# Altium PCB PCB_3U_VHDCI_Baseboard.PCBDOC (part 2 of 2)
Units mil, origin at the board's own origin, x right, y up, seen from the top; angles counter-clockwise.
Board outline 6299 x 3937 mil, 4 copper layers (TopLayer, Internal Plane 1, Internal Plane 2, BottomLayer), stack 58.425 mil thick; 56 components, 165 nets, 629 pads, 192 vias.
Unrouted connection lines stored in the file: 2.
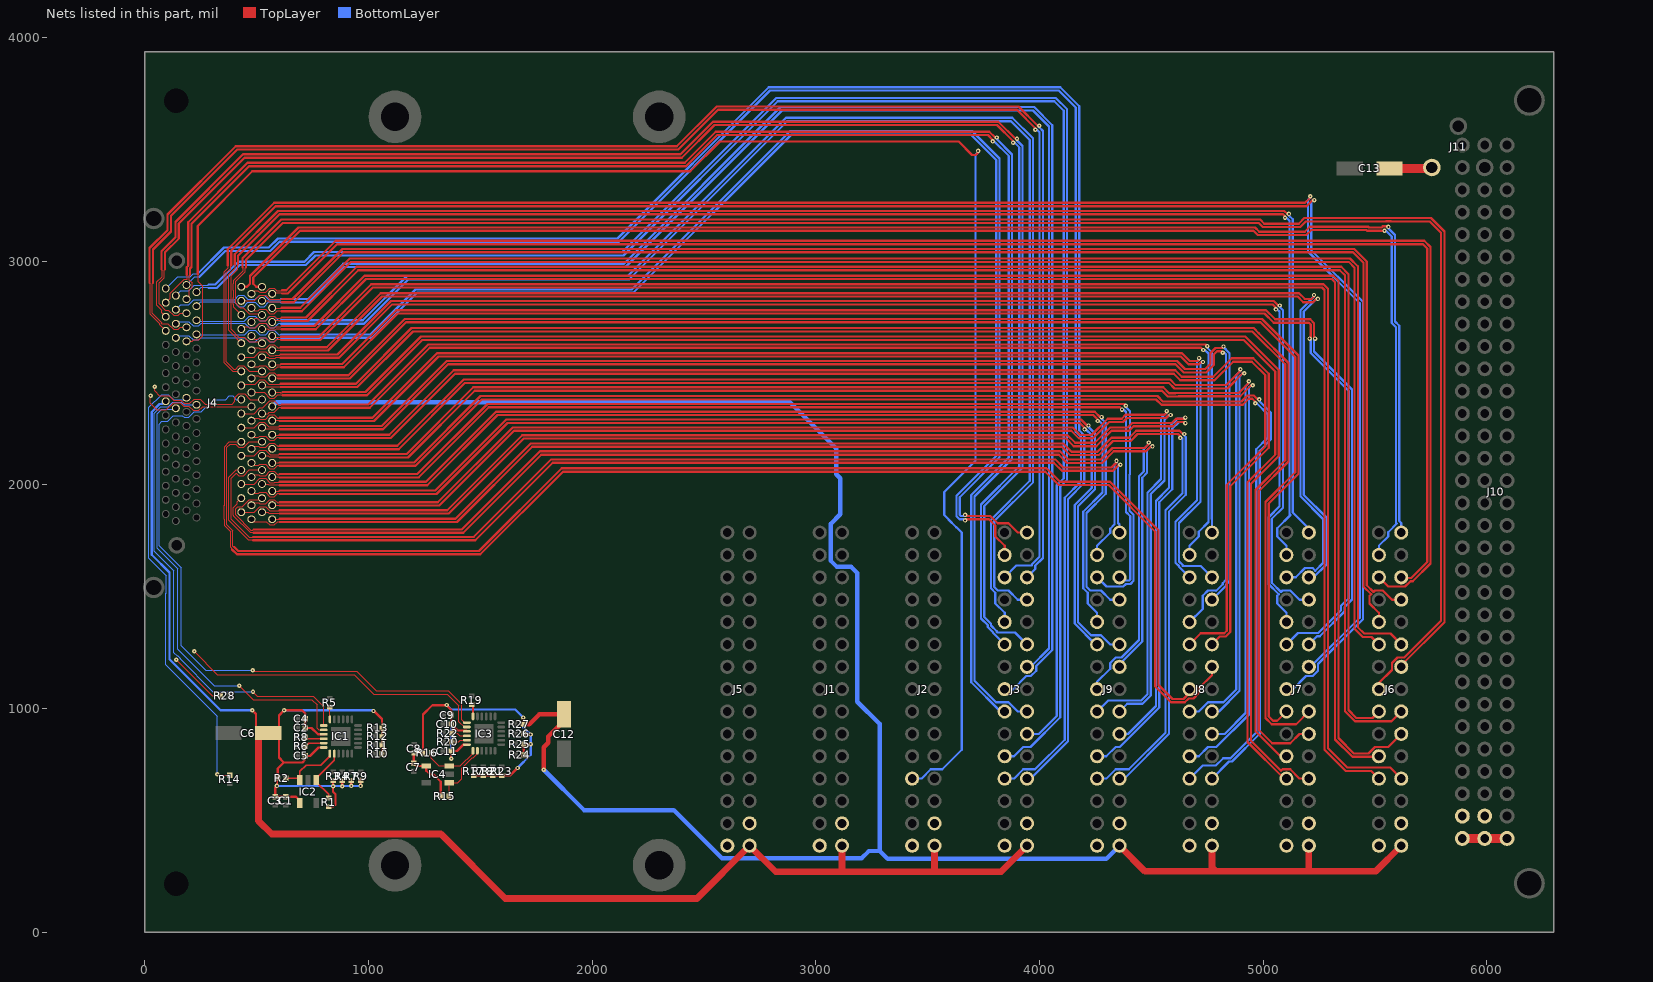
[diagram p4: the nets of this part, all layers, seen from the top]

## Via types
v1: diameter 19.68, hole 7.87, TopLayer to BottomLayer, 192 vias

## Nets (pads, with @x,y where several pads share a name; then routed paths per layer and width w, separated by ;. In a path a pad name is that pad's centre, name@x,y a point inside that pad or via, vN(x,y) a via of type N, cw(c..) or ccw(c..) an arc to the next point about the centre after c; other vN are vias at no path point) (continued)
LVDS3_8_P: J2.23 J4.L26 | length 7316.9
  TopLayer w5: J4.L26@185.43,2641.54 212.4,2641.54 218.68,2647.82 241.15,2647.82 259,2665.66 259,2888 238,2909 238,2940 235.5,2942.5 ; 535.32,3402 538.86,3402
  TopLayer w10: 235.5,2942.5 235.5,3157.71 479.79,3402 535.32,3402 ; 538.86,3402 2438,3402 2571,3535 3638,3535 3697.89,3475.11 3713.89,3475.11 3724.97,3486.18 v1(3724.97,3493.03)
  BottomLayer w10: J2.23@3430.32,686.62 3471.63,686.62 3513.13,728.11 3564.9,728.11 3652,815.21 3652,1787 3628,1811 3627.29,1811 3593,1845.29 3593,1846 3573.61,1865.39 3573.61,1967.82 3713.5,2107.71 3713.5,3474.71 3726.39,3487.61 3726.39,3491.61 v1(3724.97,3493.03)
LVDS4_1_N: J3.3 J4.L61 | length 6151.7
  TopLayer w10: v1(3667,1841.16) 3671.84,1846 3773.71,1846 3802.21,1817.5 3802.21,1769.43 3843.7,1727.93 J3.3@3843.7,1686.62
  BottomLayer w5: J4.L61@138.19,2657.28 147.66,2666.75 195.88,2666.75 214.82,2647.82 241.15,2647.82 252.22,2658.88 446.6,2658.88 465.54,2639.94 493.85,2639.94 512.78,2658.88 539.12,2658.88 558.06,2639.94 578.95,2639.94 599.17,2660.16 607,2660.16 609.5,2657.66
  BottomLayer w10: 609.5,2657.66 1014.66,2657.66 1216,2859 2183,2859 2891,3567 3692,3567 3806,3453 3806,2129.21 3628,1951.21 3628,1859.79 3641.79,1846 3662.16,1846 v1(3667,1841.16)
LVDS4_1_P: J3.2 J4.L27 | length 6056
  TopLayer w10: v1(3667,1865.84) 3671.84,1861 3779.93,1861 3812.81,1828.11 3860.89,1828.11 3902.39,1786.62 J3.2@3943.7,1786.62
  BottomLayer w5: J4.L27@230.71,2673.03 232.3,2671.44 446.6,2671.44 465.54,2690.37 493.85,2690.37 512.78,2671.44 539.12,2671.44 558.06,2690.37 578.95,2690.37 599.17,2670.16 607,2670.16 609.5,2672.66
  BottomLayer w10: 609.5,2672.66 1008.44,2672.66 1209.79,2874 2176.79,2874 2884.79,3582 3698.21,3582 3821,3459.21 3821,2123 3643,1945 3643,1866 3648,1861 3662.16,1861 v1(3667,1865.84)
LVDS4_2_N: J3.6 J4.L62 | length 6772.2
  TopLayer w5: 20.73,2902.5 23.23,2900 23.23,2762.77 66,2720 66,2715.69 J4.L62@92.91,2688.78
  TopLayer w10: 20.73,2902.5 20.73,3058.73 101,3139 101,3209.21 405.79,3514 2378,3514 2556,3692 3905.21,3692 3991.68,3605.53 v1(3998.53,3605.53)
  BottomLayer w10: J3.6@3943.7,1586.62 3981,1623.91 3981,1639 4015,1673 4015,3582.21 3998.53,3598.68 v1(3998.53,3605.53)
LVDS4_2_P: J3.5 J4.L28 | length 6880
  TopLayer w5: 35.73,2902.5 33.23,2900 33.23,2766.91 76,2724.14 76,2720 102.8,2720 127.74,2695.06 148.63,2695.06 158.1,2704.53 J4.L28@185.43,2704.53
  TopLayer w10: 35.73,2902.5 35.73,3052.51 116,3132.79 116,3203 412,3499 2384.21,3499 2562.21,3677 3899,3677 3981.08,3594.92 v1(3981.08,3588.08)
  BottomLayer w10: J3.5@3843.7,1586.62 3896.09,1639 3966,1639 3966,1645.21 4000,1679.21 4000,3576 3987.92,3588.08 v1(3981.08,3588.08)
LVDS4_3_N: J3.9 J4.L63 | length 6529.7
  BottomLayer w5: J4.L63@138.19,2720.28 147.66,2729.74 195.88,2729.74 214.82,2710.81 241.15,2710.81 252.22,2721.87 446.6,2721.87 465.54,2702.93 493.85,2702.93 512.78,2721.87 539.12,2721.87 558.06,2702.93 578.95,2702.93 599.17,2723.15 607,2723.15 609.5,2720.65
  BottomLayer w10: 609.5,2720.65 979.65,2720.65 1178,2919 2165,2919 2872,3626 3872,3626 3956,3542 3956,2018.21 3782.21,1844.42 3782.21,1537.5 3802.21,1517.5 3802.21,1469.43 3843.7,1427.93 J3.9@3843.7,1386.62
LVDS4_3_P: J3.8 J4.L29 | length 6436.1
  BottomLayer w5: J4.L29@230.71,2736.02 234.86,2731.87 444.04,2731.87 465.54,2753.37 493.85,2753.37 512.78,2734.43 539.12,2734.43 558.06,2753.37 578.95,2753.37 599.17,2733.15 607,2733.15 609.5,2735.65
  BottomLayer w10: 609.5,2735.65 973.44,2735.65 1171.79,2934 2158.79,2934 2865.79,3641 3878.21,3641 3971,3548.21 3971,2012 3797.21,1838.21 3797.21,1543.72 3812.81,1528.11 3860.89,1528.11 3902.39,1486.62 J3.8@3943.7,1486.62
LVDS4_4_N: J3.12 J4.L64 | length 6924
  TopLayer w5: 74.5,2962.5 77,2960 77,2931.14 53,2907.14 53,2803 75,2781 75,2769.69 J4.L64@92.91,2751.77
  TopLayer w10: 74.5,2962.5 74.5,3045.71 136,3107.21 136,3175.21 438.79,3478 2394,3478 2540,3624 3815.21,3624 3892.18,3547.03 v1(3899.03,3547.03)
  BottomLayer w10: v1(3899.03,3547.03) 3899.03,3540.18 3924,3515.21 3924,2077 3753,1906 3753,1409.21 3783,1379.21 3783,1371.21 3808.77,1345.45 3808.77,1342.77 3811.41,1340.12 3890.2,1340.12 J3.12@3943.7,1286.62
LVDS4_4_P: J3.11 J4.L30 | length 6866.6
  TopLayer w5: 89.5,2962.5 87,2960 87,2927 63,2903 63,2809.02 91.02,2781 104.8,2781 127.74,2758.05 148.63,2758.05 158.1,2767.52 J4.L30@185.43,2767.52
  TopLayer w10: 89.5,2962.5 89.5,3039.5 151,3101 151,3169 445,3463 2400.21,3463 2546.21,3609 3809,3609 3881.58,3536.42 v1(3881.58,3529.58)
  BottomLayer w10: J3.11@3843.7,1286.62 3792,1338.32 3792,1341 3768,1365 3768,1373 3738,1403 3738,1912.21 3909,2083.21 3909,3509 3888.42,3529.58 v1(3881.58,3529.58)
LVDS4_5_N: J3.15 J4.L65 | length 7003.9
  BottomLayer w5: J4.L65@138.19,2783.27 160.22,2805.3 195.88,2805.3 218.58,2828 400.41,2828 420.26,2847.85 441.15,2847.85 460.09,2828.92 493.85,2828.92 512.78,2847.85 533.67,2847.85 553.53,2828 606,2828 608.5,2830.5
  BottomLayer w10: 608.5,2830.5 727.5,2830.5 886,2989 2141.79,2989 2841.79,3689 3976.21,3689 4057,3608.21 4057,1261.79 3985.2,1189.99 3985.2,1169.43 3960.89,1145.12 3940.33,1145.12 3881.83,1086.62 J3.15@3843.7,1086.62
LVDS4_5_P: J3.14 J4.L31 | length 6704.4
  BottomLayer w5: J4.L31@230.71,2799.02 249.69,2818 399.69,2818 420.26,2797.42 441.15,2797.42 460.09,2816.36 493.85,2816.36 512.78,2797.42 533.67,2797.42 554.25,2818 606,2818 608.5,2815.5
  BottomLayer w10: 608.5,2815.5 733.71,2815.5 892.21,2974 2148,2974 2848,3674 3970,3674 4042,3602 4042,1268 3960.62,1186.62 J3.14@3943.7,1186.62
LVDS4_6_N: J3.18 J4.L66 | length 7023.3
  TopLayer w5: J4.L66@92.91,2814.76 112.97,2834.82 112.97,2856.7 174.99,2918.72 189,2918.72 189,2937 186.5,2939.5
  TopLayer w10: 186.5,2939.5 186.5,2973.71 193,2980.21 193,3174.21 458.79,3440 2413,3440 2552,3579 3775.21,3579 3801.18,3553.03 v1(3808.03,3553.03)
  BottomLayer w10: v1(3808.03,3553.03) 3808.03,3546.18 3877,3477.21 3877,2116 3709,1948 3709,1124.21 3805.1,1028.11 3860.89,1028.11 3902.39,986.62 J3.18@3943.7,986.62
LVDS4_6_P: J3.17 J4.L32 | length 6843.8
  TopLayer w5: J4.L32@185.43,2830.51 199,2844.08 199,2871.41 210.65,2883.06 210.65,2903.95 199,2915.6 199,2937 201.5,2939.5
  TopLayer w10: 201.5,2939.5 201.5,2967.5 208,2974 208,3168 465,3425 2419.21,3425 2558.21,3564 3769,3564 3790.58,3542.42 v1(3790.58,3535.58)
  BottomLayer w10: v1(3790.58,3535.58) 3797.42,3535.58 3862,3471 3862,2122.21 3694,1954.21 3694,1118 3825.38,986.62 J3.17@3843.7,986.62
LVDS4_7_N: J3.21 J4.L67 | length 7423.6
  BottomLayer w5: J4.L67@138.19,2846.26 160.22,2868.29 195.88,2868.29 220.59,2893 283,2893 285.5,2895.5
  BottomLayer w10: 285.5,2895.5 314.5,2895.5 417,2998 713,2998 756,3041 2133.79,3041 2822.79,3730 4072.21,3730 4123,3679.21 4123,2023 4092,1992 4092,960.79 3959.32,828.11 3926.52,828.11 3885.02,786.62 J3.21@3843.7,786.62
LVDS4_7_P: J3.20 J4.L33 | length 7135.5
  BottomLayer w5: J4.L33@230.71,2862.01 251.7,2883 283,2883 285.5,2880.5
  BottomLayer w10: 285.5,2880.5 320.71,2880.5 423.21,2983 719.21,2983 762.21,3026 2140,3026 2829,3715 4066,3715 4108,3673 4108,2029.21 4077,1998.21 4077,967 3996.62,886.62 J3.20@3943.7,886.62
LVDS4_8_N: J3.24 J4.L68 | length 7623.7
  BottomLayer w5: J4.L68@92.91,2877.76 146.16,2931 203.36,2931 216.89,2944.54 236.54,2944.54
  BottomLayer w10: 236.54,2944.54 353,3061 554,3061 595,3102 2112.79,3102 2788.79,3778 4092.21,3778 4177,3693.21 4177,2244.09 4200,2221.09 4200,2009 4127,1936 4127,854 3959.62,686.62 J3.24@3943.7,686.62
LVDS4_8_P: J3.23 J4.L34 | length 7575
  BottomLayer w5: J4.L34@185.43,2893.5 222.93,2931 244.21,2931
  BottomLayer w10: 244.21,2931 359.21,3046 560.21,3046 601.21,3087 2119,3087 2795,3763 4086,3763 4162,3687 4162,2237.88 4185,2214.88 4185,2015.21 4112,1942.21 4112,860.21 3979.9,728.11 3926.52,728.11 3885.02,686.62 J3.23@3843.7,686.62
LVDS5_1_N: J4.U35 J6.3 | length 6744.7
  TopLayer w10: J4.U35@523.23,2885.63 497.84,2885.63 484.47,2899 484.47,2927.47 693,3136 4956.79,3136 4975.79,3117 5192,3117 5214,3139 5462,3139 5464.92,3136.08 v1(5542.08,3136.08)
  BottomLayer w10: J6.3@5516.93,1686.62 5516.93,1727.93 5558.43,1769.43 5558.43,1788.43 5597.39,1827.39 5593,1831.79 5593,2704.79 5574,2723.79 5574,3111 5548.92,3136.08 v1(5542.08,3136.08)
LVDS5_1_P: J4.U1 J6.2 | length 6678.6
  TopLayer w5: J4.U1@430.71,2885.63 J4.U1@438.6,2885.63 ; 469.47,2916.5 471.97,2919 471.97,2923.14
  TopLayer w10: J4.U1@438.6,2885.63 456.1,2885.63 469.47,2899 469.47,2916.5 469.47,2933.68 686.79,3151 4963,3151 4982,3132 5185.79,3132 5207.79,3154 5469.68,3154 5472.61,3151.08 5529.01,3151.08 5533.86,3155.92 5557.14,3155.92 v1(5559.53,3153.53)
  BottomLayer w10: v1(5559.53,3153.53) 5559.53,3146.68 5589,3117.21 5589,2730 5608,2711 5608,1838 5616.93,1829.07 J6.2@5616.93,1786.62
LVDS5_2_N: J4.U36 J6.6 | length 6814.7
  TopLayer w5: J4.U36@568.5,2854.13 572.37,2858 610,2858 612.5,2855.5
  TopLayer w10: 612.5,2855.5 638.5,2855.5 859,3076 5714,3076 5733,3057 5733,1655.11 5662,1584.11 5619.43,1584.11 J6.6@5616.93,1586.62
LVDS5_2_P: J4.U2 J6.5 | length 7102.9
  TopLayer w5: J4.U2@475.98,2854.13 489.85,2868 505.2,2868 512.78,2860.41 539.12,2860.41 558.06,2879.35 578.95,2879.35 590.3,2868 610,2868 612.5,2870.5
  TopLayer w10: 612.5,2870.5 632.29,2870.5 852.79,3091 5720.21,3091 5748,3063.21 5748,1648.9 5668.21,1569.11 5658.12,1569.11 5634.12,1545.12 5558.43,1545.12 J6.5@5516.93,1586.62
LVDS5_3_N: J4.U37 J6.9 | length 6680
  TopLayer w5: J4.U37@523.23,2822.64 550.2,2822.64 553.92,2818.92 610,2818.92 612.5,2816.42
  TopLayer w10: 612.5,2816.42 665.63,2816.42 889.21,3040 5401,3040 5448,2993 5448,1544.94 5482.29,1510.65 5475.44,1503.8 5475.44,1469.43 5516.93,1427.93 J6.9@5516.93,1386.62
LVDS5_3_P: J4.U3 J6.8 | length 6801.7
  TopLayer w5: J4.U3@430.71,2822.64 487.57,2822.64 512.78,2847.85 539.12,2847.85 558.06,2828.92 610,2828.92 612.5,2831.42
  TopLayer w10: 612.5,2831.42 659.42,2831.42 883,3055 5407.21,3055 5463,2999.21 5463,1551.15 5492.89,1521.26 5499.74,1528.11 5534.12,1528.11 5575.62,1486.62 J6.8@5616.93,1486.62
LVDS5_4_N: J4.U38 J6.12 | length 6801.9
  TopLayer w5: J4.U38@568.5,2791.14 570.65,2789 609,2789 611.5,2791.5
  TopLayer w10: 611.5,2791.5 694.5,2791.5 915,3012 5388.21,3012 5423,2977.21 5423,1363 5451,1335 5568.55,1335 J6.12@5616.93,1286.62
LVDS5_4_P: J4.U4 J6.11 | length 6808.1
  TopLayer w5: J4.U4@475.98,2791.14 488.13,2779 506.92,2779 512.78,2784.86 539.12,2784.86 558.06,2765.93 578.95,2765.93 592.02,2779 609,2779 611.5,2776.5
  TopLayer w10: 611.5,2776.5 700.71,2776.5 921.21,2997 5382,2997 5408,2971 5408,1356.79 5444.79,1320 5483.55,1320 J6.11@5516.93,1286.62
LVDS5_5_N: J4.U39 J6.15 | length 7978
  TopLayer w5: 451.5,2972.5 449,2970 449,2954 406,2911 406,2896.58 405.49,2896.08 405.49,2875.19 406,2874.68 406,2833.59 405.49,2833.08 405.49,2812.19 425.69,2792 439.46,2792 465.54,2765.93 516.95,2765.93 J4.U39@523.23,2759.65
  TopLayer w10: 451.5,2972.5 451.5,3006.5 616,3171 4979.79,3171 4997.79,3153 5165,3153 5190,3178 5548.87,3178 5549.24,3178.37 5569.82,3178.37 5570.19,3178 5744,3178 5795,3127 5795,1392.21 5630.9,1228.11 5599.74,1228.11 5575.44,1203.8 5575.44,1172.65 5516.93,1114.15 J6.15@5516.93,1086.62
LVDS5_5_P: J4.U5 J6.14 | length 7801.9
  TopLayer w5: J4.U5@430.71,2759.65 396,2794.35 396,2807.54 395.49,2808.05 395.49,2837.23 396,2837.73 396,2870.54 395.49,2871.04 395.49,2900.22 396,2900.73 396,2915.14 439,2958.14 439,2970 436.5,2972.5
  TopLayer w10: 436.5,2972.5 436.5,3012.71 609.79,3186 4986,3186 5004,3168 5158.79,3168 5183.79,3193 5542.65,3193 5543.03,3193.37 5576.03,3193.37 5576.41,3193 5750.21,3193 5810,3133.21 5810,1386 5616.93,1192.93 J6.14@5616.93,1186.62
LVDS5_6_N: J4.U40 J6.18 | length 7141.9
  TopLayer w5: J4.U40@568.5,2728.15 576,2735.65 609.5,2735.65 612,2733.15
  TopLayer w10: 612,2733.15 726.36,2733.15 953.21,2960 5342,2960 5366,2936 5366,986.79 5409.79,943 5573.32,943 J6.18@5616.93,986.62
LVDS5_6_P: J4.U6 J6.17 | length 7148
  TopLayer w5: J4.U6@475.98,2728.15 493.48,2745.65 501.56,2745.65 512.78,2734.43 539.12,2734.43 558.06,2753.37 578.95,2753.37 586.67,2745.65 609.5,2745.65 612,2748.15
  TopLayer w10: 612,2748.15 720.15,2748.15 947,2975 5348.21,2975 5381,2942.21 5381,993 5416,958 5488.32,958 J6.17@5516.93,986.62
LVDS5_7_N: J4.U41 J6.21 | length 7175.8
  TopLayer w5: J4.U41@523.23,2696.65 524.57,2698 548.85,2698 553.92,2692.93 583.09,2692.93 588.16,2698 608,2698 610.5,2695.5
  TopLayer w10: 610.5,2695.5 763.71,2695.5 988.21,2920 5307,2920 5321,2906 5321,861.79 5398.79,784 5514.32,784 J6.21@5516.93,786.62
LVDS5_7_P: J4.U7 J6.20 | length 7423.4
  TopLayer w5: J4.U7@430.71,2696.65 442.06,2708 460.47,2708 465.54,2702.93 493.85,2702.93 512.78,2721.87 539.12,2721.87 558.06,2702.93 578.95,2702.93 584.02,2708 608,2708 610.5,2710.5
  TopLayer w10: 610.5,2710.5 757.5,2710.5 982,2935 5313.21,2935 5336,2912.21 5336,868 5405,799 5470.63,799 5499.74,828.11 5558.43,828.11 J6.20@5616.93,886.62
LVDS5_8_N: J4.U42 J6.24 | length 7268.1
  TopLayer w5: J4.U42@568.5,2665.16 573.5,2660.16 607,2660.16 609.5,2662.66
  TopLayer w10: 609.5,2662.66 777.66,2662.66 1012,2897 5269.21,2897 5289,2877.21 5289,822 5375,736 5567.55,736 J6.24@5616.93,686.62
LVDS5_8_P: J4.U8 J6.23 | length 7274.2
  TopLayer w5: J4.U8@475.98,2665.16 490.98,2650.16 504.06,2650.16 512.78,2658.88 539.12,2658.88 558.06,2639.94 578.95,2639.94 589.17,2650.16 607,2650.16 609.5,2647.66
  TopLayer w10: 609.5,2647.66 783.87,2647.66 1018.21,2882 5263,2882 5274,2871 5274,815.79 5368.79,721 5482.55,721 J6.23@5516.93,686.62
LVDS6_1_N: J4.U43 J7.3 | length 6839.5
  TopLayer w5: 416.5,2986.5 414,2984 414,2965 385,2936 385,2695.26 419.26,2661 444.48,2661 465.54,2639.94 516.95,2639.94 J4.U43@523.23,2633.66
  TopLayer w10: 416.5,2986.5 416.5,3025.5 601,3210 5088,3210 5099,3199 5099,3196 v1(5097.08,3194.08)
  BottomLayer w10: v1(5097.08,3194.08) 5103.92,3194.08 5117,3181 5117,1869.79 5121.39,1865.39 5062.05,1806.05 5062.05,1769.43 5103.55,1727.93 J7.3@5103.55,1686.62
LVDS6_1_P: J4.U9 J7.2 | length 6696.2
  TopLayer w5: 401.5,2986.5 404,2984 404,2969.14 375,2940.14 375,2691.11 413.37,2652.74 413.37,2651 J4.U9@430.71,2633.66
  TopLayer w10: 401.5,2986.5 401.5,3031.71 594.79,3225 5094.21,3225 5109.61,3209.61 5112.61,3209.61 v1(5114.53,3211.53)
  BottomLayer w10: v1(5114.53,3211.53) 5114.53,3204.68 5132,3187.21 5132,1876 5203.55,1804.45 J7.2@5203.55,1786.62
LVDS6_2_N: J4.U44 J7.6 | length 6156.3
  TopLayer w5: J4.U44@568.5,2602.17 569.34,2603 603,2603 605.5,2600.5
  TopLayer w10: 605.5,2600.5 818.71,2600.5 1060.21,2842 5153.79,2842 5179.18,2816.61 5222.61,2816.61 5237.58,2831.58 v1(5244.42,2831.58)
  BottomLayer w10: J7.6@5203.55,1586.62 5224.62,1586.62 5282.39,1644.39 5282.39,1853.82 5181,1955.21 5181,2775 5237.58,2831.58 v1(5244.42,2831.58)
LVDS6_2_P: J4.U10 J7.5 | length 6360
  TopLayer w5: J4.U10@475.98,2602.17 486.82,2613 508.23,2613 512.78,2608.45 539.12,2608.45 558.06,2627.38 578.95,2627.38 593.33,2613 603,2613 605.5,2615.5
  TopLayer w10: 605.5,2615.5 812.5,2615.5 1054,2857 5160,2857 5185.39,2831.61 5216.39,2831.61 5226.97,2842.18 v1(5226.97,2849.03)
  BottomLayer w10: J7.5@5103.55,1586.62 5144.86,1586.62 5186.36,1628.11 5220.73,1628.11 5232.82,1616.03 5267.39,1650.61 5267.39,1847.61 5166,1949 5166,2781.21 5226.97,2842.18 v1(5226.97,2849.03)
LVDS6_3_N: J4.U45 J7.9 | length 6118.6
  TopLayer w5: J4.U45@523.23,2570.67 550.2,2570.67 553.92,2566.95 583.09,2566.95 586.81,2570.67 603,2570.67 605.5,2568.17
  TopLayer w10: 605.5,2568.17 867.38,2568.17 1106.21,2807 5041,2807 5056.58,2791.42 v1(5056.58,2784.58)
  BottomLayer w10: v1(5056.58,2784.58) 5057,2785 5063,2785 5073,2775 5073,1904.21 5023,1854.21 5023,1556.56 5068.9,1510.65 5062.05,1503.8 5062.05,1469.43 5103.55,1427.93 J7.9@5103.55,1386.62
LVDS6_3_P: J4.U11 J7.8 | length 6240.3
  TopLayer w5: J4.U11@430.71,2570.67 487.57,2570.67 512.78,2595.89 539.12,2595.89 558.06,2576.95 578.95,2576.95 582.67,2580.67 603,2580.67 605.5,2583.17
  TopLayer w10: 605.5,2583.17 861.17,2583.17 1100,2822 5047.21,2822 5067.18,2802.03 v1(5074.03,2802.03)
  BottomLayer w10: v1(5074.03,2802.03) 5073.61,2801.61 5073.61,2795.61 5088,2781.21 5088,1898 5038,1848 5038,1562.77 5079.51,1521.26 5086.36,1528.11 5120.73,1528.11 5162.23,1486.62 J7.8@5203.55,1486.62
LVDS6_4_N: J4.U46 J7.12 | length 6381.9
  TopLayer w5: J4.U46@568.5,2539.17 569.68,2538 606,2538 608.5,2540.5
  TopLayer w10: 608.5,2540.5 882.5,2540.5 1123,2781 5012,2781 5053,2740 5210.21,2740 5227,2723.21 5227,2658.84 v1(5231.84,2654)
  BottomLayer w10: J7.12@5203.55,1286.62 5239.93,1323 5252.21,1323 5363,1433.79 5363,1453 5397,1487 5397,2426.21 5227,2596.21 5227,2649.16 v1(5231.84,2654)
LVDS6_4_P: J4.U12 J7.11 | length 6550.8
  TopLayer w5: J4.U12@475.98,2539.17 487.16,2528 507.89,2528 512.78,2532.89 539.12,2532.89 558.06,2513.96 578.95,2513.96 592.99,2528 606,2528 608.5,2525.5
  TopLayer w10: 608.5,2525.5 888.71,2525.5 1129.21,2766 5005.79,2766 5046.79,2725 5204,2725 5212,2717 5212,2658.84 v1(5207.16,2654)
  BottomLayer w10: J7.11@5103.55,1286.62 5154.93,1338 5246,1338 5348,1440 5348,1459.21 5382,1493.21 5382,2420 5212,2590 5212,2649.16 v1(5207.16,2654)
LVDS6_5_N: J4.U47 J7.15 | length 8099
  TopLayer w5: 385.5,2981.5 383,2979 383,2967 364,2948 364,2551.14 397.47,2517.68 405.05,2517.68 420.26,2532.89 441.15,2532.89 466.37,2507.68 J4.U47@523.23,2507.68
  TopLayer w10: 385.5,2981.5 385.5,3047.5 584,3246 5193.21,3246 5220.68,3273.47 v1(5227.53,3273.47)
  BottomLayer w10: J7.15@5103.55,1086.62 5132.83,1086.62 5191.33,1145.12 5220.73,1145.12 5245.04,1169.43 5245.04,1198.83 5446,1399.79 5446,2818.21 5214.61,3049.61 5214.61,3267.39 5220.68,3273.47 v1(5227.53,3273.47)
LVDS6_5_P: J4.U13 J7.14 | length 7853.9
  TopLayer w5: 370.5,2981.5 373,2979 373,2971.14 354,2952.14 354,2547 393.32,2507.68 J4.U13@430.71,2507.68
  TopLayer w10: 370.5,2981.5 370.5,3053.71 577.79,3261 5187,3261 5210.08,3284.08 v1(5210.08,3290.92)
  BottomLayer w10: J7.14@5203.55,1186.62 5211.62,1186.62 5431,1406 5431,2812 5199.61,3043.39 5199.61,3273.61 5210.08,3284.08 v1(5210.08,3290.92)
LVDS6_6_N: J4.U48 J7.18 | length 6642.5
  TopLayer w5: J4.U48@568.5,2476.18 570.32,2478 592.35,2478 594.85,2475.5
  TopLayer w10: 594.85,2475.5 915.71,2475.5 1167.21,2727 4988,2727 5143,2572 5143,2056.21 5010,1923.21 5010,957.79 5037.79,930 5146.93,930 J7.18@5203.55,986.62
LVDS6_6_P: J4.U14 J7.17 | length 6648.6
  TopLayer w5: J4.U14@475.98,2476.18 487.8,2488 507.24,2488 512.78,2482.46 539.12,2482.46 558.06,2501.4 578.95,2501.4 592.35,2488 594.85,2490.5
  TopLayer w10: 594.85,2490.5 909.5,2490.5 1161,2742 4994.21,2742 5158,2578.21 5158,2050 5025,1917 5025,964 5044,945 5061.93,945 J7.17@5103.55,986.62
LVDS6_7_N: J4.U49 J7.21 | length 6622
  TopLayer w5: J4.U49@523.23,2444.69 528.23,2439.69 604,2439.69 606.5,2437.19
  TopLayer w10: 606.5,2437.19 949.4,2437.19 1198.21,2686 4951,2686 5098,2539 5098,2110.21 4965,1977.21 4965,899 5077.38,786.62 J7.21@5103.55,786.62
LVDS6_7_P: J4.U15 J7.20 | length 6830.5
  TopLayer w5: J4.U15@430.71,2444.69 436.99,2450.96 493.85,2450.96 512.78,2469.9 533.67,2469.9 553.89,2449.69 604,2449.69 606.5,2452.19
  TopLayer w10: 606.5,2452.19 943.19,2452.19 1192,2701 4957.21,2701 4980,2678.21 5113,2545.21 5113,2104 4980,1971 4980,905.21 5040.09,845.12 5120.73,845.12 5162.23,886.62 J7.20@5203.55,886.62
LVDS6_8_N: J4.U50 J7.24 | length 6708.8
  TopLayer w5: J4.U50@568.5,2413.19 603.81,2413.19 604,2413 613,2413 615.5,2415.5
  TopLayer w10: 615.5,2415.5 986.5,2415.5 1234,2663 4919.21,2663 5069,2513.21 5069,2129 4945,2005 4945,856.21 5079.73,721.48 5086.36,728.11 5120.73,728.11 5162.23,686.62 J7.24@5203.55,686.62
LVDS6_8_P: J4.U16 J7.23 | length 6706.4
  TopLayer w5: J4.U16@475.98,2413.19 532.84,2413.19 558.06,2387.97 578.95,2387.97 594.17,2403.19 596.93,2403.19 597.12,2403 613,2403 615.5,2400.5
  TopLayer w10: 615.5,2400.5 992.71,2400.5 1240.21,2648 4913,2648 5054,2507 5054,2135.21 4930,2011.21 4930,850 5093.38,686.62 J7.23@5103.55,686.62
LVDS7_1_N: J4.U53 J8.3 | length 5302.5
  TopLayer w5: J4.U53@523.23,2318.7 550.2,2318.7 556.48,2324.98 578.95,2324.98 600.97,2347 608,2347 610.5,2344.5
  TopLayer w10: 610.5,2344.5 1004.71,2344.5 1273.21,2613 4722.15,2613 v1(4732.08,2603.08)
  BottomLayer w10: J8.3@4670.48,1686.62 4670.48,1727.93 4711.97,1769.43 4711.97,1790.97 4755.48,1834.48 4755.48,1838.39 4755,1838.87 4755,2539.02 4755.27,2539.29 4755.27,2559.87 4755,2560.13 4755,2587 4738.92,2603.08 v1(4732.08,2603.08)
LVDS7_1_P: J4.U19 J8.2 | length 5308.1
  TopLayer w5: J4.U19@430.71,2318.7 487.57,2318.7 512.78,2343.92 526.56,2343.92 558.06,2375.41 578.95,2375.41 597.36,2357 608,2357 610.5,2359.5
  TopLayer w10: 610.5,2359.5 998.5,2359.5 1267,2628 4742.06,2628 v1(4749.53,2620.53)
  BottomLayer w10: v1(4749.53,2620.53) 4749.53,2613.68 4770,2593.21 4770,2566.35 4770.27,2566.08 4770.27,2533.07 4770,2532.81 4770,1849 4770.48,1848.52 J8.2@4770.48,1786.62
LVDS7_2_N: J4.U54 J8.6 | length 5421.8
  TopLayer w5: J4.U54@568.5,2287.2 569.3,2288 600,2288 602.5,2285.5
  TopLayer w10: 602.5,2285.5 1023.71,2285.5 1312.21,2574 4630.79,2574 4665.68,2539.11 4713.11,2539.11 4723.58,2549.58 v1(4730.42,2549.58)
  BottomLayer w10: v1(4730.42,2549.58) 4728,2552 4726,2552 4719,2545 4719,1925 4623.61,1829.61 4623.61,1657.61 4639.65,1641.56 4639.65,1638.65 4641.3,1637 4720.09,1637 J8.6@4770.48,1586.62
LVDS7_2_P: J4.U20 J8.5 | length 5453.3
  TopLayer w5: J4.U20@475.98,2287.2 486.78,2298 508.27,2298 512.78,2293.48 539.12,2293.48 558.06,2312.42 578.95,2312.42 593.37,2298 600,2298 602.5,2300.5
  TopLayer w10: 602.5,2300.5 1017.5,2300.5 1306,2589 4637,2589 4671.89,2554.11 4706.89,2554.11 4712.97,2560.18 v1(4712.97,2567.03)
  BottomLayer w10: J8.5@4670.48,1586.62 4623,1634.09 4623,1637 4608,1652 4608,1835.21 4704,1931.21 4704,2551.21 4715.39,2562.61 4715.39,2564.61 v1(4712.97,2567.03)
LVDS7_3_N: J4.U55 J8.9 | length 5810.7
  TopLayer w5: J4.U55@523.23,2255.71 528.23,2250.71 600,2250.71 602.5,2248.21
  TopLayer w10: 602.5,2248.21 1064.42,2248.21 1355.21,2539 4607.79,2539 4643.79,2503 4746.21,2503 4779,2535.79 4779,2583.34 4793,2597.34 4812.66,2597.34 v1(4819,2591)
  BottomLayer w10: J8.9@4670.48,1386.62 4728.98,1445.12 4728.98,1503.8 4753.29,1528.11 4787.66,1528.11 4789.21,1526.56 4818.32,1555.68 4818.32,1560.54 4833.45,1575.66 4833.45,2583.55 4824,2593 4821,2593 v1(4819,2591)
LVDS7_3_P: J4.U21 J8.8 | length 5791.8
  TopLayer w5: J4.U21@430.71,2255.71 487.57,2255.71 512.78,2280.93 533.67,2280.93 553.89,2260.71 600,2260.71 602.5,2263.21
  TopLayer w10: 602.5,2263.21 1058.21,2263.21 1349,2554 4614,2554 4650,2518 4740,2518 4764,2542 4764,2589.56 4786.79,2612.34 4815.66,2612.34 v1(4822,2618.68)
  BottomLayer w10: J8.8@4770.48,1486.62 4834,1550.14 4834,1555 4849,1570 4849,1574 4848.45,1574.55 4848.45,2589.77 4822,2616.21 v1(4822,2618.68)
LVDS7_4_N: J4.U56 J8.12 | length 5982.5
  TopLayer w5: J4.U56@568.5,2224.21 570.72,2222 600,2222 602.5,2224.5
  TopLayer w10: 602.5,2224.5 1092.5,2224.5 1380,2512 4606.5,2512 4635.5,2483 4776,2483 4859,2566 4955.21,2566 5024,2497.21 5024,2165.79 4852,1993.79 4852,1341.79 4832.21,1322 4805.86,1322 J8.12@4770.48,1286.62
LVDS7_4_P: J4.U22 J8.11 | length 6151.3
  TopLayer w5: J4.U22@475.98,2224.21 488.2,2212 506.85,2212 512.78,2217.93 539.12,2217.93 558.06,2199 578.95,2199 591.95,2212 600,2212 602.5,2209.5
  TopLayer w10: 602.5,2209.5 1098.71,2209.5 1386.21,2497 4600.29,2497 4629.29,2468 4782.21,2468 4865.21,2551 4949,2551 5009,2491 5009,2172 4837,2000 4837,1348 4826,1337 4720.86,1337 J8.11@4670.48,1286.62
LVDS7_5_N: J4.U57 J8.15 | length 5933.6
  TopLayer w5: 399.61,1722.07 396.07,1722.07 392.69,1725.45 392.69,1794.07 389.76,1797 365.64,1821.12 365.64,1850.59 365.49,1850.74 365.49,1904.77 365.64,1904.92 365.64,2167.36 381,2182.72 405.05,2182.72 420.26,2167.5 441.15,2167.5 466.37,2192.72 J4.U57@523.23,2192.72
  TopLayer w10: 399.61,1722.07 417.34,1704.34 1493.34,1704.34 1863,2074 4031.21,2074 4091.21,2014 4315.21,2014 4532,1797.21 4532,1105 4594,1043 4643,1043 4670.48,1070.48 J8.15@4670.48,1086.62
LVDS7_5_P: J4.U23 J8.14 | length 6034.2
  TopLayer w5: 389,1711.46 389,1715 382.69,1721.31 382.69,1789.93 355.64,1816.98 355.64,1846.45 355.49,1846.6 355.49,1908.91 355.64,1909.06 355.64,2171.5 376.86,2192.72 J4.U23@430.71,2192.72
  TopLayer w10: 389,1711.46 411.13,1689.34 1499.55,1689.34 1869.21,2059 4025,2059 4085,1999 4309,1999 4517,1791 4517,1098.79 4587.79,1028 4649.21,1028 4666.33,1045.12 4687.66,1045.12 4711.97,1069.43 4711.97,1090.76 4770.48,1149.26 J8.14@4770.48,1186.62
LVDS7_6_N: J4.U58 J8.18 | length 6105.1
  TopLayer w5: J4.U58@568.5,2161.22 569.28,2162 600,2162 602.5,2159.5
  TopLayer w10: 602.5,2159.5 1134.71,2159.5 1431.21,2456 4577.79,2456 4602.79,2431 4840,2431 4908.58,2499.58 v1(4915.42,2499.58)
  BottomLayer w10: J8.18@4770.48,986.62 4801.62,986.62 4894,1079 4894,2485 4908.58,2499.58 v1(4915.42,2499.58)
LVDS7_6_P: J4.U24 J8.17 | length 6298.8
  TopLayer w5: J4.U24@475.98,2161.22 486.76,2172 508.28,2172 512.78,2167.5 539.12,2167.5 558.06,2186.44 578.95,2186.44 593.39,2172 600,2172 602.5,2174.5
  TopLayer w10: 602.5,2174.5 1128.5,2174.5 1425,2471 4584,2471 4609,2446 4833.79,2446 4897.97,2510.18 v1(4897.97,2517.03)
  BottomLayer w10: J8.17@4670.48,986.62 4711.79,986.62 4753.29,1028.11 4821.9,1028.11 4879,1085.21 4879,2491.21 4897.97,2510.18 v1(4897.97,2517.03)
LVDS7_7_N: J4.U59 J8.21 | length 6414.6
  TopLayer w5: J4.U59@523.23,2129.72 550.2,2129.72 554.92,2125 599,2125 601.5,2122.5
  TopLayer w10: 601.5,2122.5 1175.71,2122.5 1474.21,2421 4546.79,2421 4572.79,2395 4620,2395 4621,2396 4897,2396 4946.58,2445.58 v1(4953.42,2445.58)
  BottomLayer w10: J8.21@4670.48,786.62 4711.79,786.62 4753.29,828.11 4790.32,828.11 4936,973.79 4936,2435 4946.58,2445.58 v1(4953.42,2445.58)
LVDS7_7_P: J4.U25 J8.20 | length 6363.8
  TopLayer w5: J4.U25@430.71,2129.72 487.57,2129.72 512.78,2154.94 539.12,2154.94 559.06,2135 599,2135 601.5,2137.5
  TopLayer w10: 601.5,2137.5 1169.5,2137.5 1468,2436 4553,2436 4579,2410 4607,2410 4608,2411 4890.79,2411 4935.97,2456.18 v1(4935.97,2463.03)
  BottomLayer w10: J8.20@4770.48,886.62 4827.62,886.62 4921,980 4921,2441.21 4935.97,2456.18 v1(4935.97,2463.03)
LVDS7_8_N: J4.U60 J8.24 | length 6400
  TopLayer w5: J4.U60@568.5,2098.23 568.73,2098 600,2098 602.5,2100.5
  TopLayer w10: 602.5,2100.5 1203.5,2100.5 1500,2397 4527,2397 4551,2373 4902.28,2373 4929.28,2400 4957.21,2400 4975.18,2382.03 v1(4982.03,2382.03)
  BottomLayer w10: J8.24@4770.48,686.62 4846.86,763 4860.21,763 4984,886.79 4984,2153 5034,2203 5034,2323.21 4982.03,2375.18 v1(4982.03,2382.03)
LVDS7_8_P: J4.U26 J8.23 | length 6568.8
  TopLayer w5: J4.U26@475.98,2098.23 486.21,2088 508.83,2088 512.78,2091.95 539.12,2091.95 558.06,2073.01 578.95,2073.01 593.94,2088 600,2088 602.5,2085.5
  TopLayer w10: 602.5,2085.5 1209.71,2085.5 1506.21,2382 4520.79,2382 4544.79,2358 4908.5,2358 4935.5,2385 4951,2385 4964.58,2371.42 v1(4964.58,2364.58)
  BottomLayer w10: J8.23@4670.48,686.62 4728.98,745.12 4787.66,745.12 4820.54,778 4854,778 4969,893 4969,2159.21 5019,2209.21 5019,2317 4971.42,2364.58 v1(4964.58,2364.58)
LVDS8_1_N: J4.U61 J9.3 | length 4969.8
  TopLayer w5: 484.5,1767.5 482,1765 467,1765 385.64,1846.36 385.64,1858.88 385.49,1859.03 385.49,1896.48 385.64,1896.63 385.64,2029.5 408.96,2052.82 420.26,2041.52 441.15,2041.52 466.37,2066.73 J4.U61@523.23,2066.73
  TopLayer w10: 484.5,1767.5 1470.5,1767.5 1817,2114 4070,2114 4106,2078 4321.79,2078 4343.97,2100.18 v1(4343.97,2107.03)
  BottomLayer w10: J9.3@4257.09,1686.62 4257.09,1727.93 4315.59,1786.43 4315.59,1803.8 4335.29,1823.5 4335,1823.79 4335,2091.21 4343.97,2100.18 v1(4343.97,2107.03)
LVDS8_1_P: J4.U27 J9.2 | length 4767.4
  TopLayer w5: J4.U27@430.71,2066.73 408.73,2066.73 375.64,2033.64 375.64,1900.78 375.49,1900.63 375.49,1854.88 375.64,1854.73 375.64,1842.22 462.86,1755 482,1755 484.5,1752.5
  TopLayer w10: 484.5,1752.5 1476.71,1752.5 1823.21,2099 4063.79,2099 4099.79,2063 4328,2063 4354.58,2089.58 v1(4361.42,2089.58)
  BottomLayer w10: J9.2@4357.09,1786.62 4357.09,1822.91 4350,1830 4350,2085 4354.58,2089.58 v1(4361.42,2089.58)
LVDS8_2_N: J4.U62 J9.6 | length 4770.3
  TopLayer w5: J4.U62@568.5,2035.24 569.27,2036 600,2036 602.5,2033.5
  TopLayer w10: 602.5,2033.5 1223.71,2033.5 1537.21,2347 4358.15,2347 v1(4368.58,2336.58)
  BottomLayer w10: J9.6@4357.09,1586.62 4371.71,1572 4400,1572 4405,1577 4405,1860 4386.61,1878.39 4386.61,2325.39 4375.42,2336.58 v1(4368.58,2336.58)
LVDS8_2_P: J4.U28 J9.5 | length 5054.3
  TopLayer w5: J4.U28@475.98,2035.24 486.75,2046 508.3,2046 512.78,2041.52 539.12,2041.52 558.06,2060.45 578.95,2060.45 593.4,2046 600,2046 602.5,2048.5
  TopLayer w10: 602.5,2048.5 1217.5,2048.5 1531,2362 4378.06,2362 v1(4386.03,2354.03)
  BottomLayer w10: J9.5@4257.09,1586.62 4298.59,1545.12 4374.28,1545.12 4386.16,1557 4406.21,1557 4420,1570.79 4420,1866.21 4401.61,1884.61 4401.61,2045.76 4403.84,2048 4403.84,2329.37 4386.03,2347.18 v1(4386.03,2354.03)
LVDS8_3_N: J4.U63 J9.9 | length 4857.2
  TopLayer w5: J4.U63@523.23,2003.74 550.2,2003.74 553.92,2000.02 583.09,2000.02 584.07,2001 600,2001 602.5,1998.5
  TopLayer w10: 602.5,1998.5 1262.5,1998.5 1576,2312 4240,2312 4259.58,2292.42 v1(4259.58,2285.58)
  BottomLayer w10: J9.9@4257.09,1386.62 4257.09,1427.93 4215.59,1469.43 4215.59,1517.5 4195.16,1537.94 4195.16,1880.37 4281,1966.21 4281,2271 4266.42,2285.58 v1(4259.58,2285.58)
LVDS8_3_P: J4.U29 J9.8 | length 4978.9
  TopLayer w5: J4.U29@430.71,2003.74 487.57,2003.74 512.78,2028.96 539.12,2028.96 558.06,2010.02 578.95,2010.02 579.93,2011 600,2011 602.5,2013.5
  TopLayer w10: 602.5,2013.5 1256.29,2013.5 1569.79,2327 4246.21,2327 4270.18,2303.03 v1(4277.03,2303.03)
  BottomLayer w10: v1(4277.03,2303.03) 4277.03,2296.18 4296,2277.21 4296,1960 4210.16,1874.16 4210.16,1544.16 4226.2,1528.11 4274.28,1528.11 4315.77,1486.62 J9.8@4357.09,1486.62
LVDS8_4_N: J4.U64 J9.12 | length 4943
  TopLayer w5: J4.U64@568.5,1972.24 568.75,1972 600,1972 602.5,1974.5
  TopLayer w10: 602.5,1974.5 1297.5,1974.5 1615,2292 4185.21,2292 4211.68,2265.53 v1(4218.53,2265.53)
  BottomLayer w10: v1(4218.53,2265.53) 4218.53,2258.68 4248,2229.21 4248,1980 4172,1904 4172,1386.21 4230.1,1328.11 4274.28,1328.11 4315.77,1286.62 J9.12@4357.09,1286.62
LVDS8_4_P: J4.U30 J9.11 | length 4949.1
  TopLayer w5: J4.U30@475.98,1972.24 486.23,1962 508.82,1962 512.78,1965.96 539.12,1965.96 558.06,1947.03 578.95,1947.03 593.92,1962 600,1962 602.5,1959.5
  TopLayer w10: 602.5,1959.5 1303.71,1959.5 1621.21,2277 4179,2277 4201.08,2254.92 v1(4201.08,2248.08)
  BottomLayer w10: v1(4201.08,2248.08) 4207.92,2248.08 4233,2223 4233,1986.21 4157,1910.21 4157,1380 4250.38,1286.62 J9.11@4257.09,1286.62
LVDS8_5_N: J4.U65 J9.15 | length 5686.2
  TopLayer w5: 485.5,1800.5 483,1798 474,1798 405.64,1866.36 405.64,1867.16 405.49,1867.31 405.49,1888.2 405.64,1888.35 405.64,1894.21 414.41,1902.97 434.04,1902.97 465.54,1934.47 516.95,1934.47 J4.U65@523.23,1940.75
  TopLayer w10: 485.5,1800.5 1416.5,1800.5 1766,2150 4091.5,2150 4128.5,2113 4273.79,2113 4325.79,2165 4469.79,2165 4487.47,2182.68 v1(4487.47,2189.53)
  BottomLayer w10: J9.15@4257.09,1086.62 4257.09,1119.3 4315.59,1177.81 4315.59,1203.8 4339.9,1228.11 4365.9,1228.11 4444,1306.21 4444,2038.39 4465.61,2060 4465.61,2160.82 4488.39,2183.61 4488.39,2188.61 v1(4487.47,2189.53)
LVDS8_5_P: J4.U31 J9.14 | length 5476.5
  TopLayer w5: J4.U31@430.71,1940.75 413.49,1923.53 413.49,1916.2 395.64,1898.35 395.64,1892.49 395.49,1892.34 395.49,1863.17 395.64,1863.02 395.64,1862.22 469.86,1788 483,1788 485.5,1785.5
  TopLayer w10: 485.5,1785.5 1422.71,1785.5 1772.21,2135 4085.29,2135 4122.29,2098 4280,2098 4332,2150 4476,2150 4498.08,2172.08 v1(4504.92,2172.08)
  BottomLayer w10: J9.14@4357.09,1186.62 4357.09,1198.09 4459,1300 4459,2032.18 4480.61,2053.79 4480.61,2154.61 4499,2173 4504,2173 v1(4504.92,2172.08)
LVDS8_6_N: J4.U66 J9.18 | length 5678.8
  TopLayer w5: J4.U66@568.5,1909.25 569.25,1910 600,1910 602.5,1907.5
  TopLayer w10: 602.5,1907.5 1315.71,1907.5 1650.21,2242 4141.79,2242 4175.55,2208.23 4238.58,2208.23 4311.35,2281 4373,2281 4390.5,2298.5 4564.71,2298.5 4578.68,2312.47 v1(4585.53,2312.47)
  BottomLayer w10: J9.18@4357.09,986.62 4391.47,1021 4460.21,1021 4497,1057.79 4497,1959 4558,2020 4558,2291.79 4578.68,2312.47 v1(4585.53,2312.47)
LVDS8_6_P: J4.U32 J9.17 | length 5872.6
  TopLayer w5: J4.U32@475.98,1909.25 486.73,1920 508.31,1920 512.78,1915.53 539.12,1915.53 558.06,1934.47 578.95,1934.47 593.42,1920 600,1920 602.5,1922.5
  TopLayer w10: 602.5,1922.5 1309.5,1922.5 1644,2257 4148,2257 4181.77,2223.23 4232.37,2223.23 4305.13,2296 4366.79,2296 4384.29,2313.5 4558.5,2313.5 4568.08,2323.08 v1(4568.08,2329.92)
  BottomLayer w10: J9.17@4257.09,986.62 4306.47,1036 4454,1036 4482,1064 4482,1965.21 4543,2026.21 4543,2298 4568.08,2323.08 v1(4568.08,2329.92)
LVDS8_7_N: J4.U67 J9.21 | length 6043.1
  TopLayer w5: J4.U67@523.23,1877.76 550.2,1877.76 553.92,1874.04 599,1874.04 601.5,1871.54
  TopLayer w10: 601.5,1871.54 1357.75,1871.54 1693.21,2207 4118.79,2207 4152.79,2173 4252.84,2173 4321.84,2242 4400,2242 4420,2262 4597,2262 4616,2281 4647.16,2281 v1(4652,2276.16)
  BottomLayer w10: J9.21@4257.09,786.62 4298.41,786.62 4339.9,828.11 4358.32,828.11 4535,1004.79 4535,1922 4593,1980 4593,2251 4623,2281 4647.16,2281 v1(4652,2276.16)
LVDS8_7_P: J4.U33 J9.20 | length 6017.1
  TopLayer w5: J4.U33@430.71,1877.76 487.57,1877.76 512.78,1902.97 539.12,1902.97 558.06,1884.04 599,1884.04 601.5,1886.54
  TopLayer w10: 601.5,1886.54 1351.54,1886.54 1687,2222 4125,2222 4159,2188 4246.63,2188 4315.63,2257 4393.79,2257 4413.79,2277 4590.79,2277 4609.79,2296 4647.16,2296 v1(4652,2300.84)
  BottomLayer w10: J9.20@4357.09,886.62 4395.62,886.62 4520,1011 4520,1928.21 4578,1986.21 4578,2257.21 4616.79,2296 4647.16,2296 v1(4652,2300.84)
LVDS8_8_N: J4.U68 J9.24 | length 5958.3
  TopLayer w5: J4.U68@568.5,1846.26 568.76,1846 600,1846 602.5,1848.5
  TopLayer w10: 602.5,1848.5 1388.5,1848.5 1725,2185 4106,2185 4143,2148 4258.79,2148 4321.79,2211 4400.79,2211 4431.79,2242 4625.21,2242 4639.68,2227.53 v1(4646.53,2227.53)
  BottomLayer w10: J9.24@4357.09,686.62 4378.62,686.62 4578,886 4578,1880 4653.89,1955.89 4653.89,2213.32 4646.53,2220.68 v1(4646.53,2227.53)
LVDS8_8_P: J4.U34 J9.23 | length 6123.9
  TopLayer w5: J4.U34@475.98,1846.26 486.24,1836 543.1,1836 558.06,1821.04 578.95,1821.04 593.91,1836 600,1836 602.5,1833.5
  TopLayer w10: 602.5,1833.5 1394.71,1833.5 1731.21,2170 4099.79,2170 4136.79,2133 4265,2133 4328,2196 4407,2196 4438,2227 4619,2227 4629.08,2216.92 v1(4629.08,2210.08)
  BottomLayer w10: J9.23@4257.09,686.62 4298.41,686.62 4339.9,728.11 4398.9,728.11 4563,892.21 4563,1886.21 4638.89,1962.11 4638.89,2207.11 4635.92,2210.08 v1(4629.08,2210.08)
NetIC1_1: IC1.1 IC2.3 R2.1 | length 278
  TopLayer w6: R2.1@630.5,689 682.78,689 IC2.3@691.6,680.18 691.6,718.6 720,747 787,747 826.79,786.79 IC1.1@826.79,798.23
NetIC1_2: IC1.2 IC2.1 R1.1 | length 253.5
  TopLayer w6: R1.1@821,600.5 821,616 766.4,670.6 IC2.1@766.4,680.18 766.4,689.4 846.47,769.47 IC1.2@846.47,798.23
NetIC1_18: IC1.18 R5.2 | length 55.8
  TopLayer w5: IC1.18@826.79,951.77 826.79,1007.28 R5.2@827,1007.5
NetIC1_22: IC1.22 R8.2 | length 84.6
  TopLayer w6: R8.2@717.5,872 724.35,865.16 IC1.22@799.23,865.16
NetIC1_23: IC1.23 R6.2 | length 87.7
  TopLayer w6: R6.2@717.5,831 731.98,845.47 IC1.23@799.23,845.47
NetIC3_1: IC3.1 IC4.3 R16.1 | length 260.1
  TopLayer w5: R16.1@1280.5,803 1280.5,777.5 1314.6,743.4 IC4.3@1360.18,743.4 1409.4,743.4 1466.79,800.79 IC3.1@1466.79,811.23
NetIC3_2: IC3.2 IC4.1 R15.1 | length 280.4
  TopLayer w5: R15.1@1359.5,608 1360.18,608.68 IC4.1@1360.18,668.6 1398.6,668.6 1417,687 1417,732.53 1463.82,779.34 1467.34,779.34 1486.47,798.47 IC3.2@1486.47,811.23
NetIC3_18: IC3.18 R19.2 | length 55.7
  TopLayer w10: R19.2@1462,1018.5 1466.79,1013.71 IC3.18@1466.79,964.77
NetIC3_22: IC3.22 R22.2 | length 72.2
  TopLayer w5: R22.2@1371.5,889 1397,889 1407.84,878.16 IC3.22@1439.23,878.16
NetIC3_23: IC3.23 R20.2 | length 70.8
  TopLayer w5: R20.2@1371.5,851 1402,851 1409.47,858.47 IC3.23@1439.23,858.47
NetJ4_L18: J4.L18 R14.2 | length 2038
  TopLayer w5: v1(323,706) 327.5,701.5 R14.2@380,701.5
  BottomLayer w5: J4.L18@185.43,2389.57 185.43,2380.1 127.74,2380.1 104.84,2403 74,2403 17,2346 17,1672 94.7,1594.3 94.7,1516.55 93,1514.85 93,1195 323,965 v1(323,706)
NetJ4_U18: J4.U18 R28.2 | length 800.5
  TopLayer w5: v1(25,2399) 23,2397 23,2365 53,2335 81.42,2335 82.47,2336.04 96.25,2336.04 127.74,2367.54 157.66,2367.54 173.4,2351.79 195.88,2351.79 214.82,2332.85 241.15,2332.85 258.5,2350.2 J4.U18@475.98,2350.2 ; v1(140,1218) 301,1057 R28.2@338.5,1057
P3V3_MP1: C1.2 C2.2 C3.2 C4.2 C5.2 C6.1 IC1.21 IC1.24 IC2.4 J1.30 J2.30 J3.30 J4.L52 J5.30 R1.2 R2.2 R3.2 R4.2 R7.2 R9.2 R10.2 R11.2 R12.2 R13.2 | length 8393.8
  TopLayer w10: v1(480,992) 496,976 C6.1@496,909 ; IC2.4@685,596 675.28,605.72 C1.2@629,605.72 C3.2@582,605.72 582,646 v1(590,654) 590,685.5 R2.2@593.5,689 593.5,731.5 621,759 ; IC1.24@799.23,825.79 775.79,825.79 738,788 C5.2@715.72,788 715.72,770.72 704,759 621,759 ; IC1.21@799.23,884.84 773.16,884.84 745,913 C2.2@716.72,913 C4.2@716.72,955 716.72,977.28 702,992 v1(622,992) 599,969 599,781 621,759 ; R1.2@821,562.5 843.5,562.5 852,571 852,617 841,628 v1(841,653) R3.2@841,678.5 ; v1(882,652) R4.2@882,678.5 ; v1(922,654) R7.2@922,678.5 ; v1(964,654) R9.2@964,679.5 ; v1(1022,989) 1024,989 1059.5,953.5 R13.2@1059.5,913 R12.2@1059.5,875 R11.2@1059.5,836 R10.2@1059.5,797
  TopLayer w20: J3.30@3928.62,386.62 J3.30@3943.7,386.62
  TopLayer w30: C6.1@508,873 508,498 567,439 1323,439 1611,151 2467.93,151 J5.30@2703.55,386.62 2820.16,270 3112,270 ; J1.30@3116.93,386.62 3116.93,274.93 3112,270 ; J2.30@3530.32,386.62 3530.32,272.68 3533,270 ; J3.30@3943.7,386.62 3827.09,270 3533,270 ; 3112,270 3533,270
  BottomLayer w10: J4.L52@92.91,2373.82 78,2373.82 78,2361.1 65.28,2361.1 30.01,2325.83 30.01,1687.99 110,1608 110,1219.94 337.94,992 v1(480,992) ; v1(590,654) v1(922,654) v1(964,654) ; v1(622,992) 1019,992 v1(1022,989)
P3V3_MP2: C7.2 C8.2 C9.2 C10.2 C11.2 C12.1 IC3.21 IC3.24 IC4.4 J4.U52 J6.30 J7.30 J8.30 J9.30 R15.2 R16.2 R17.2 R18.2 R21.2 R23.2 R24.2 R25.2 R26.2 R27.2 | length 11548.7
  TopLayer w10: R15.2@1322.5,608 1322.5,672.82 1290.31,705 1275,705 1257.82,722.18 IC4.4@1257.82,743.4 1213.31,743.4 C7.2@1202,754.72 1202,802.28 C8.2@1203,803.28 1243.21,803.28 R16.2@1243.5,803 1243.5,973.5 1285,1015 1348,1015 1369.72,993.28 C9.2@1369.72,971 C10.2@1369.72,929 1397.22,901.5 1435.57,901.5 IC3.21@1439.23,897.84 ; v1(1369,775) 1368.72,775.28 C11.2@1368.72,810 1395,810 1423.79,838.79 IC3.24@1439.23,838.79 ; R17.2@1471,700.5 R18.2@1512,700.5 R21.2@1554,700.5 R23.2@1595,700.5 1632.5,700.5 v1(1666,734) ; R27.2@1691.5,929 v1(1691.5,959.5) ; R26.2@1692.5,888 1696.5,884 v1(1724,884) ; R24.2@1693.5,794 R25.2@1693.5,840 1724,840 v1(1725,841)
  TopLayer w20: R27.2@1691.5,929 1718,929 1763.58,974.58 C12.1@1874,974.58 1874,946 1803,875 1803,847 1783,827 v1(1783,726)
  TopLayer w30: J9.30@4357.09,386.62 4471.71,272 4788,272 ; J8.30@4770.48,386.62 4770.48,289.52 4788,272 ; J7.30@5203.55,386.62 5203.55,272.55 5203,272 ; J6.30@5616.93,386.62 5502.32,272 5203,272 ; 4788,272 5203,272
  BottomLayer w10: v1(1349,1016) 1369,996 ; v1(1369,775) 1369,996 ; v1(1666,734) 1725,793 v1(1725,841) 1725,883 v1(1724,884) 1691.5,916.5 v1(1691.5,959.5) 1655.01,996 1369,996
  BottomLayer w20: J4.U52@568.5,2350.2 588.31,2370 2884,2370 3091,2163 3091,2047 3109,2029 3109,1868 3067,1826 3067,1660 3093.89,1633.11 3157.89,1633.11 3185,1606 3185,1031 3285,931 3285,363 ; v1(1783,726) 1963,546 2364,546 2580,330 3204,330 3237,363 3285,363 ; J9.30@4357.09,386.62 4298.09,327.61 3320.39,327.61 3285,363
P5V0: J10.a32 J10.b32 J10.c32 | length 200
  TopLayer w40: J10.c32@5890,419 J10.b32@5990,419 J10.a32@6090,419
P12V0: C13.1 J1.28 J1.29 J2.28 J2.29 J3.28 J3.29 J5.28 J5.29 J6.28 J6.29 J7.28 J7.29 J8.28 J8.29 J9.28 J9.29 J10.b31 J10.c31 J11.1 | length 190.9
  TopLayer w40: C13.1@5564.58,3415 5749.78,3415 J11.1@5753.78,3419
VHDCI1_SCL: IC1.19 J4.L17 | length 2176.9
  TopLayer w5: v1(483,1075) 503,1055 753,1055 799.23,1008.77 IC1.19@799.23,924.21
  BottomLayer w5: J4.L17@230.71,2358.07 174.89,2358.07 162.86,2370.1 124.85,2370.1 103.36,2348.6 70.46,2348.6 42.51,2320.65 42.51,1702.35 129,1615.86 129,1250 143.66,1235.34 147.18,1235.34 157.34,1225.18 157.34,1221.66 304,1075 v1(483,1075)
VHDCI1_SDA: IC1.20 J4.L51 | length 2048.8
  TopLayer w5: v1(422,1102) 484,1040 746,1040 770,1016 770,912 777.47,904.53 IC1.20@799.23,904.53
  BottomLayer w5: J4.L51@138.19,2342.32 134.47,2338.6 74.6,2338.6 54,2318 54,1716 146,1624 146,1265 309,1102 v1(422,1102)
VHDCI2_SCL: IC3.19 J4.U17 | length 2926.1
  TopLayer w5: J4.U17@430.71,2381.69 J4.U17@430.71,2383.29 ; v1(482,1171) 486,1167 947,1167 1035,1079 1357,1079 1416.5,1019.5 1416.5,949.5 1428.79,937.21 IC3.19@1439.23,937.21
  BottomLayer w5: J4.U17@430.71,2381.69 408.83,2381.69 392.18,2398.34 377.82,2398.34 361.17,2381.69 306.69,2381.69 251,2326 220.52,2326 195.88,2301.36 174.99,2301.36 167.35,2309 127,2309 102,2284 76,2284 64,2272 64,1727.86 163,1628.86 163,1280 272,1171 v1(482,1171)
VHDCI2_SDA: IC3.20 J4.U51 | length 1978.1
  TopLayer w5: v1(43.31,2438.31) 43.31,2420.69 64.96,2399.04 108.81,2399.04 128.84,2379 160.34,2379 174.99,2364.35 201.33,2364.35 220.26,2383.29 247.71,2383.29 270,2361 389.53,2361 402.34,2373.82 402.34,2390.34 418.91,2406.91 446.6,2406.91 471.82,2381.69 J4.U51@523.23,2381.69 ; v1(220,1256) 324,1152 935,1152 1024,1063 1352,1063 1403,1012 1403,941 1426.47,917.53 IC3.20@1439.23,917.53
pads on no net: IC1.12 IC1.13 IC1.14 IC1.15 IC1.16 IC1.17 IC2.5 IC3.12 IC3.13 IC3.14 IC3.15 IC3.16 IC3.17 IC4.5 J10.a1 J10.a2 J10.a3 J10.a4 J10.a5 J10.a6 J10.a7 J10.a8 J10.a10 J10.a12 J10.a13 J10.a14 J10.a15 J10.a16 J10.a18 J10.a20 J10.a21 J10.a22 J10.a23 J10.a24 J10.a25 J10.a26 J10.a27 J10.a28 J10.a29 J10.a30 J10.a31 J10.b1 J10.b3 J10.b4 J10.b5 J10.b6 J10.b7 J10.b8 J10.b9 J10.b10 J10.b11 J10.b13 J10.b14 J10.b15 J10.b16 J10.b17 J10.b18 J10.b19 J10.b21 J10.b24 J10.b25 J10.b26 J10.b27 J10.b28 J10.b29 J10.b30 J10.c1 J10.c2 J10.c3 J10.c4 J10.c5 J10.c6 J10.c7 J10.c8 J10.c10 J10.c11 J10.c12 J10.c13 J10.c14 J10.c15 J10.c16 J10.c17 J10.c18 J10.c19 J10.c20 J10.c21 J10.c22 J10.c23 J10.c24 J10.c25 J10.c26 J10.c27 J10.c28 J10.c29 J10.c30 J10.MTG1 J10.MTG2 J11.3

## Polygon pours and split planes (outlines as drawn)
GND on Internal Plane 1 (split plane): 6278.9,20.1 20.1,20.1 20.1,3916.9 6278.9,3916.9
VHDCI2_SDA on Internal Plane 2 (split plane): 63.45,2437.94 63.45,1725 63.64,1724.02 64.2,1723.2 195.45,1591.94 195.45,1298 195.65,1297.02 196.2,1296.2 233.45,1258.94 233.45,1250.06 222.94,1239.55 215.06,1239.55 178.55,1276.06 178.55,1586 178.35,1586.98 177.8,1587.8 56.68,1708.92 56.68,2403.86 56.49,2404.84 55.94,2405.67 28.55,2433.06 28.55,2439.49 28.55,2445.94 36.06,2453.45 47.94,2453.45
P12V0 on Internal Plane 2 (split plane): 5836.45,3431.94 5836.45,615 5836.65,614.02 5837.2,613.2 5882.2,568.2 5883.02,567.65 5884,567.45 6096.94,567.45 6127.45,536.94 6127.45,489.06 6118.94,480.55 5885,480.55 5884.02,480.35 5883.2,479.8 5848.2,444.8 5847.65,443.98 5847.45,443 5847.45,317.06 5785.94,255.55 2571.06,255.55 2475.55,351.06 2475.55,493.94 2527.06,545.45 5575,545.45 5575.98,545.65 5576.8,546.2 5657.8,627.2 5658.35,628.02 5658.55,629 5658.55,3211 5658.35,3211.98 5657.8,3212.8 5518.55,3352.06 5518.55,3454.94 5550.06,3486.45 5781.94,3486.45
NetJ4_U18 on Internal Plane 2 (split plane): 37.45,2411.94 37.45,1680 37.64,1679.02 38.2,1678.2 157.45,1558.94 157.45,1213.06 146.94,1202.55 132.06,1202.55 125.55,1209.06 125.55,1556 125.35,1556.98 124.8,1557.8 20.55,1662.06 20.55,2414.72 24.28,2418.45 30.94,2418.45
GND on Internal Plane 2 (split plane): 6278.9,20.1 20.1,20.1 20.1,1655.3 120.45,1554.94 120.45,1208 120.65,1207.02 121.2,1206.2 129.2,1198.2 130.02,1197.65 131,1197.45 148,1197.45 148.98,1197.65 149.8,1198.2 161.8,1210.2 162.35,1211.02 162.55,1212 162.55,1560 162.35,1560.98 161.8,1561.8 42.55,1681.06 42.55,2411.85 51.59,2402.81 51.59,1707.86 51.78,1706.89 52.33,1706.06 173.45,1584.94 173.45,1275 173.65,1274.02 174.2,1273.2 212.2,1235.2 213.02,1234.65 214,1234.45 224,1234.45 224.98,1234.65 225.8,1235.2 237.8,1247.2 238.35,1248.02 238.55,1249 238.55,1260 238.35,1260.98 237.8,1261.8 200.55,1299.06 200.55,1593 200.35,1593.98 199.8,1594.8 68.55,1726.06 68.55,2439 68.36,2439.98 67.8,2440.8 50.8,2457.8 49.98,2458.35 49,2458.55 35,2458.55 34.02,2458.35 33.2,2457.8 24.2,2448.8 23.64,2447.98 23.45,2447 23.45,2439.49 23.45,2432 23.64,2431.02 24.2,2430.2 30.85,2423.55 23.23,2423.55 22.25,2423.35 21.43,2422.8 20.1,2421.47 20.1,3916.9 6278.9,3916.9

## Keep-outs
KeepOutLayer:
  lines w8: -2,319 -2,3619 240,3619 240,3819 6090,3819 6090,3619 6240,3619 6240,319 6090,319 6090,119 240,119 240,319 -2,319

## Other copper
TopLayer:
  rectangle net GND: 5251,3377 5346,3455
Internal Plane 2 (plane layer: these items are gaps in the copper):
  lines w5: 43,2456 49,2456 ; 43,2456 35,2456 26,2447 26,2439.49 26,2432 54.14,2403.86 54.14,1707.86 176,1586 176,1275 214,1237 224,1237 236,1249 236,1260 198,1298 198,1593 66,1725 66,2439 49,2456 ; 43,2456 49,2456 ; 18,1661 123,1556 123,1208 131,1200 148,1200 160,1212 160,1560 40,1680 40,2413 32,2421 23.23,2421 18,2415.77 18,1661 ; 2473,350 2570,253 5787,253 5850,316 5850,443 5885,478 6120,478 6130,488 6130,538 6098,570 5884,570 5839,615 5839,3433 5783,3489 5587,3489 5549,3489 5516,3456 5516,3351 5656,3211 5656,629 5575,548 2526,548 2473,495 2473,350

## Silkscreen, mask and mechanical layers (free items; w line width, h text height)
TopOverlay:
  circle w10: c140,3717 r112.5
  circle w10: c140,217 r112.5
Mechanical1:
  the board outline again, w20

## Dimensions
-20,217 to 0,0 on Mechanical4
140,-20 to 0,0 on Mechanical4

## Text inside footprints (layer, text, board x,y; h text height)
J1: TopOverlay "30" at 3171.93,411.62 h40 r270; Mechanical14 "30" at 3171.93,411.62 h40 r270
J2: TopOverlay "30" at 3585.32,411.62 h40 r270; Mechanical14 "30" at 3585.32,411.62 h40 r270
J3: TopOverlay "30" at 3998.7,411.62 h40 r270; Mechanical14 "30" at 3998.7,411.62 h40 r270
J4: TopOverlay "LOWER" at 6.24,2267.36 h47.24 r90; TopOverlay "UPPER" at 371.99,2265.39 h47.24 r90; Mechanical14 "LOWER" at 6.24,2267.36 h47.24 r90; Mechanical14 "UPPER" at 371.99,2265.39 h47.24 r90
J5: TopOverlay "30" at 2758.55,411.62 h40 r270; Mechanical14 "30" at 2758.55,411.62 h40 r270
J6: TopOverlay "30" at 5671.93,411.62 h40 r270; Mechanical14 "30" at 5671.93,411.62 h40 r270
J7: TopOverlay "30" at 5258.55,411.62 h40 r270; Mechanical14 "30" at 5258.55,411.62 h40 r270
J8: TopOverlay "30" at 4825.48,411.62 h40 r270; Mechanical14 "30" at 4825.48,411.62 h40 r270
J9: TopOverlay "30" at 4412.09,411.62 h40 r270; Mechanical14 "30" at 4412.09,411.62 h40 r270
J10: TopOverlay "a" at 6043.74,3599.71 h47.24 r90; TopOverlay "b" at 5981.73,3600.89 h47.24 r90; TopOverlay "c" at 5897.09,3598.72 h47.24 r90; TopOverlay "1" at 5812.64,3497.35 h47.24; TopOverlay "32" at 5752.6,393.41 h47.24; TopOverlay "5" at 5796.89,3091.44 h47.24; TopOverlay "10" at 5755.55,2593.41 h47.24; TopOverlay "15" at 5756.54,2097.35 h47.24; TopOverlay "20" at 5752.6,1593.41 h47.24; TopOverlay "25" at 5752.6,1093.41 h47.24; TopOverlay "30" at 5752.6,593.41 h47.24; Mechanical14 "a" at 6115,3494 h47.24 r90; Mechanical14 "c" at 5915,3494 h47.24 r90; Mechanical14 "1" at 5812.64,3497.35 h47.24; Mechanical14 "32" at 5752.6,393.41 h47.24; Mechanical14 "5" at 5796.89,3091.44 h47.24; Mechanical14 "10" at 5755.55,2593.41 h47.24; Mechanical14 "15" at 5756.54,2097.35 h47.24; Mechanical14 "20" at 5752.6,1593.41 h47.24; Mechanical14 "25" at 5752.6,1093.41 h47.24; Mechanical14 "30" at 5752.6,593.41 h47.24; Mechanical14 "c" at 5897.09,3598.72 h47.24 r90; Mechanical14 "b" at 5981.73,3600.89 h47.24 r90; Mechanical14 "a" at 6043.74,3599.71 h47.24 r90; Mechanical8 "PCB" at 6290,1894 h47.24 r90